# EAGLE board Adapter-Stamps-001 (EAGLE 7.3.0)
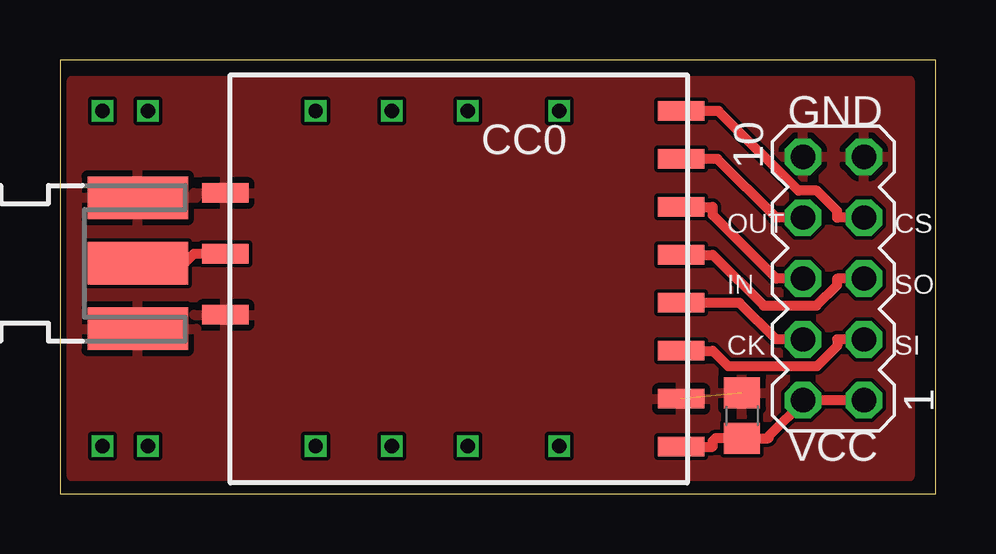
[diagram p0: board, top side]
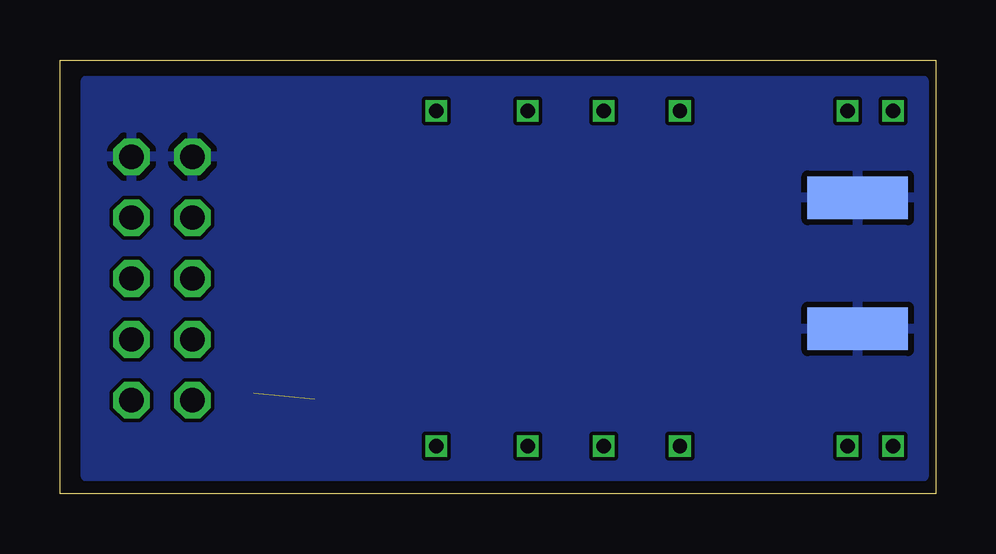
[diagram p1: board, bottom side, seen from below]

Size 36.5 x 18.09 mm. Coordinates in mm from the lower left corner, seen from the top.
Outline: 0,18.09 0,0 36.5,0 36.5,18.09 0,18.09
Copper layers (1*16): Top 0.035mm / dielectric 1.5mm / Bottom 0.035mm
Design rules "SeeedStudio_2layer_DRU_no_angle_20140221": minimum track width 6mil, minimum drill 12mil, track to track 6mil, track to pad 6mil, pad to pad 6mil, via to via 6mil, smd to smd 0mil, copper to edge 10mil, drill to drill 10mil, minimum pad ring 10mil, minimum via ring 6mil, stop-mask expansion 2mil, vias tented up to drill 100mil, thermal gap 10mil
Net classes: 0 default: width 0.406 mm; 1 PWR: width 0.305 mm

## Footprints (pad centres in the part's own frame; a part is rotated, then mirrored left to right if it is on the bottom)
C0805 = smd 1.3 x 1.5: 1 -0.95,0; 2 0.95,0
CC1101_MODULE1_SMD = smd 1.93 x 0.813: ANT 19,5.96; CSN 0,0; GDO0 0,2; GDO2 0,4; GND@0 0,12; GND@1 19,8.5; GND@2 19,3.42; MISO 0,6; MOSI 0,10; SCLK 0,8; VCC 0,14
MA05-2 = drill 1.016 octagon: 1 -5.08,-1.27; 2 -5.08,1.27; 3 -2.54,-1.27; 4 -2.54,1.27; 5 0,-1.27; 6 0,1.27; 7 2.54,-1.27; 8 2.54,1.27; 9 5.08,-1.27; 10 5.08,1.27
SMA = smd 4.191 x 1.778: 1 2.115,0; GND@1 2.115,2.733; GND@2 2.115,-2.733 | smd 4.191 x 1.778 bottom: GND@3 2.115,2.733; GND@4 2.115,-2.733

## Placement (x,y rotation side)
C1  22pF  [C0805]  28.43,3.26 270 top
CC0  CC1101_MODULE1SMD  [CC1101_MODULE1_SMD]  25.89,15.96 180 top
CC_X0  [MA05-2]  32.24,8.97 90 top
X2  SMA  [SMA]  1.13,9.61 0 top

## Library data of the parts
C1 = rcl
CC0 = wireless
CC_X0 = con-lstb; OC_FARNELL: unknown; OC_NEWARK: unknown
X2 = sma

## Nets
CC_CS0: CC0.CSN CC_X0.7
CC_IN_0: CC0.GDO2 CC_X0.6
CC_OUT_0: CC0.GDO0 CC_X0.8
GND: C1.1 CC0.GND@0 CC0.GND@1 CC0.GND@2 CC_X0.9 CC_X0.10 X2.GND@1 X2.GND@2 X2.GND@3 X2.GND@4
MISO1: CC0.MISO CC_X0.5
MOSI1: CC0.MOSI CC_X0.3
N$4: CC0.ANT X2.1
SCK1: CC0.SCLK CC_X0.4
VCC: C1.2 CC0.VCC CC_X0.1 CC_X0.2

## Tracks (layer width: path | path; a pad name or v marks a point on that pad's centre or on a via)
CC_CS0
  Top 0.406: CC_X0.7 32.4,11.51 32.4,11.79 31.56,12.63 30.78,12.63 27.45,15.96 CC0.CSN
CC_IN_0
  Top 0.406: CC0.GDO2 27.22,11.96 27.22,11.62 29.86,8.97 CC_X0.6
CC_OUT_0
  Top 0.406: CC_X0.8 29.86,11.51 27.41,13.96 CC0.GDO0
GND  (1 unrouted)
  pour Bottom: 0.49,17.23 0.49,0.72 35.42,0.72 35.42,17.23
  pour Top: 0.49,0.72 0.49,17.23 35.42,17.23 35.42,0.72
MISO1
  Top 0.406: CC_X0.5 32.4,8.97 32.4,8.7 31.54,7.84 29.33,7.84 27.22,9.96 CC0.MISO
MOSI1
  Top 0.406: CC0.MOSI 27.22,5.96 27.86,5.32 31.56,5.32 32.4,6.16 32.4,6.44 CC_X0.3
N$1  (via drill 0.6)
  other vias: 1.77,15.96
N$2  (via drill 0.6)
  other vias: 3.67,15.96
N$3  (via drill 0.6)
  other vias: 1.77,1.99
N$4
  Top 0.406: CC0.ANT 5.57,10 5.18,9.61 X2.1
N$5  (via drill 0.6)
  other vias: 3.67,1.99
N$6  (via drill 0.6)
  other vias: 20.81,1.99
N$7  (via drill 0.6)
  other vias: 17,1.99
N$8  (via drill 0.6)
  other vias: 13.83,1.99
N$9  (via drill 0.6)
  other vias: 10.65,1.99
N$10  (via drill 0.6)
  other vias: 10.65,15.96
N$11  (via drill 0.6)
  other vias: 13.83,15.96
N$12  (via drill 0.6)
  other vias: 17,15.96
N$13  (via drill 0.6)
  other vias: 20.81,15.96
SCK1
  Top 0.406: CC_X0.4 29.86,6.44 28.33,7.96 CC0.SCLK
VCC
  Top 0.406: CC0.VCC 27.22,1.96 27.22,2.2 27.33,2.31 C1.2 29.54,2.31 29.54,2.38 31.05,3.9 | 31.05,3.9 CC_X0.2 | CC_X0.1 31.05,3.9

## Text on the board
tNames: GND | OUT | CS | IN | SO | CK | SI | VCC